# Altium PCB BLDC_driver.PcbDoc
Units mm, origin at the board's own origin, x right, y up, seen from the top; angles counter-clockwise.
Board outline 177.5 x 127.5 mm, 2 copper layers (Top Layer, Bottom Layer); 147 components, 89 nets, 430 pads, 11 vias.
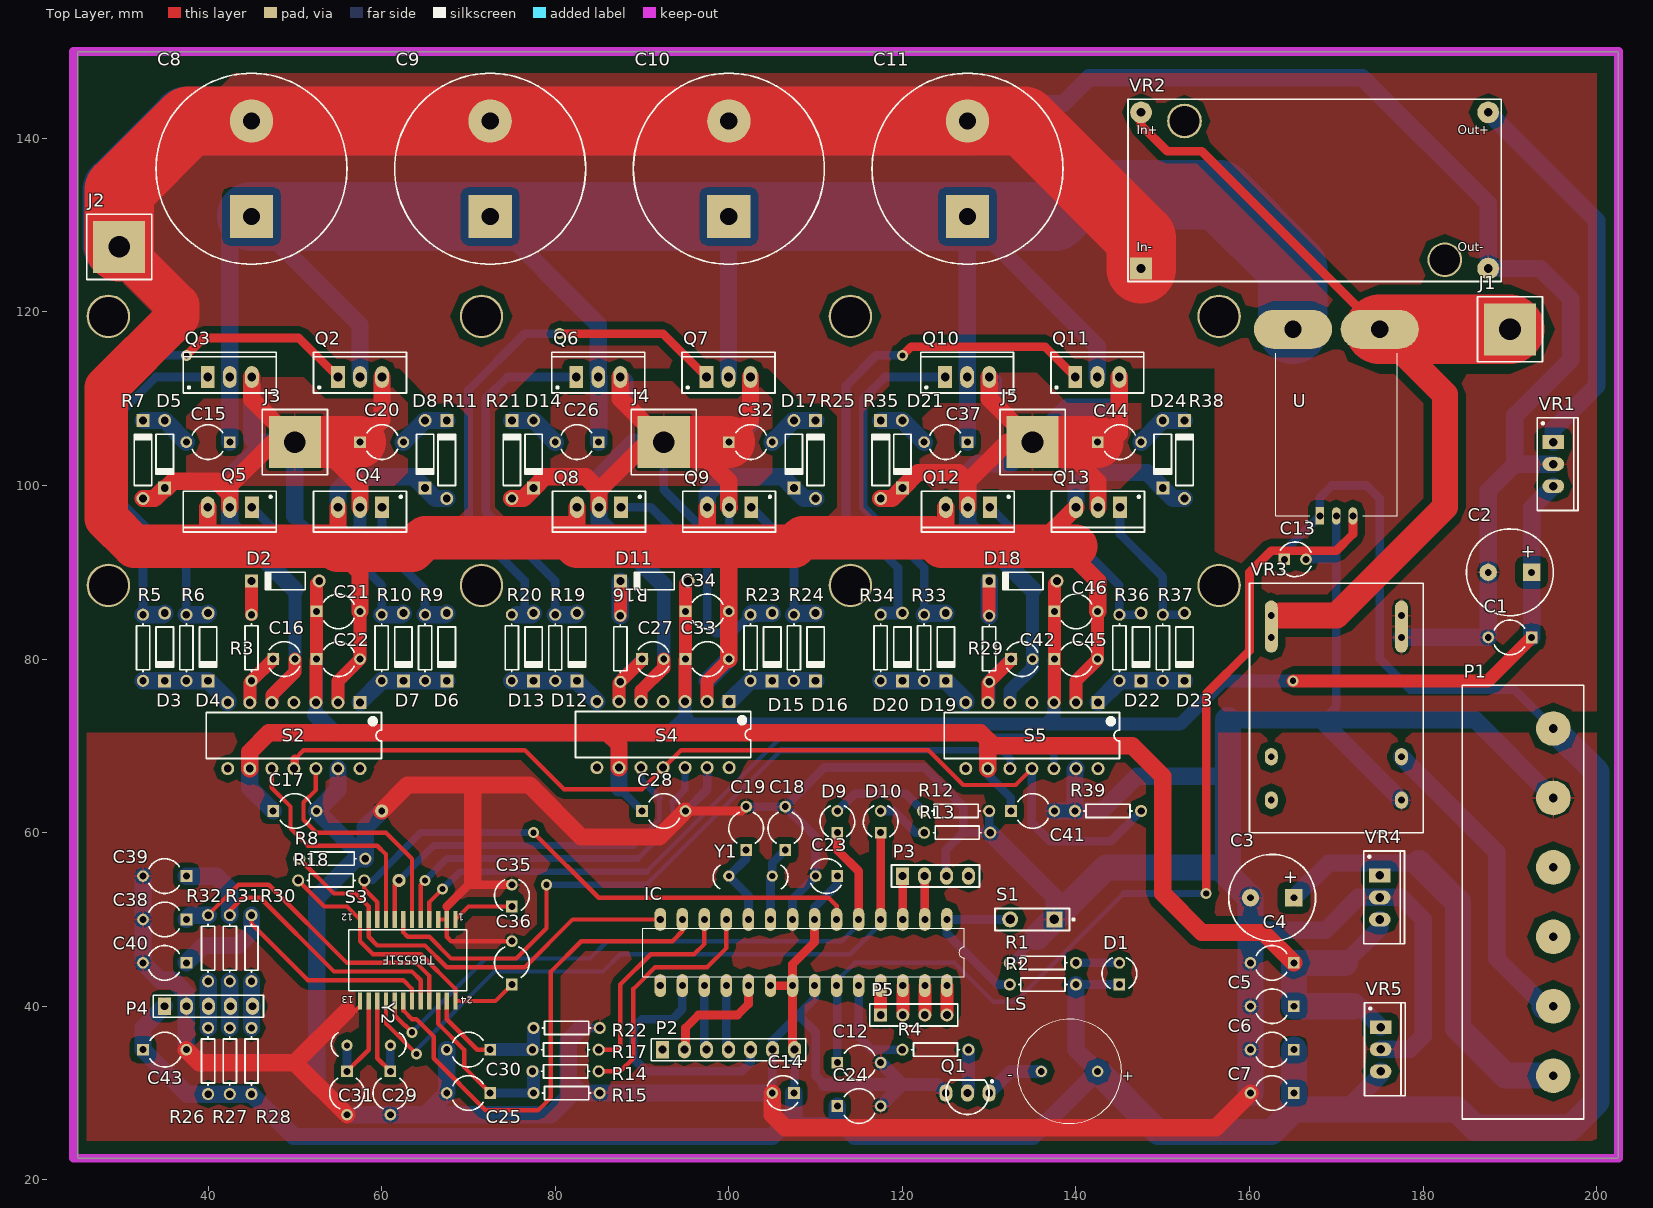
[diagram p0: Top Layer view]
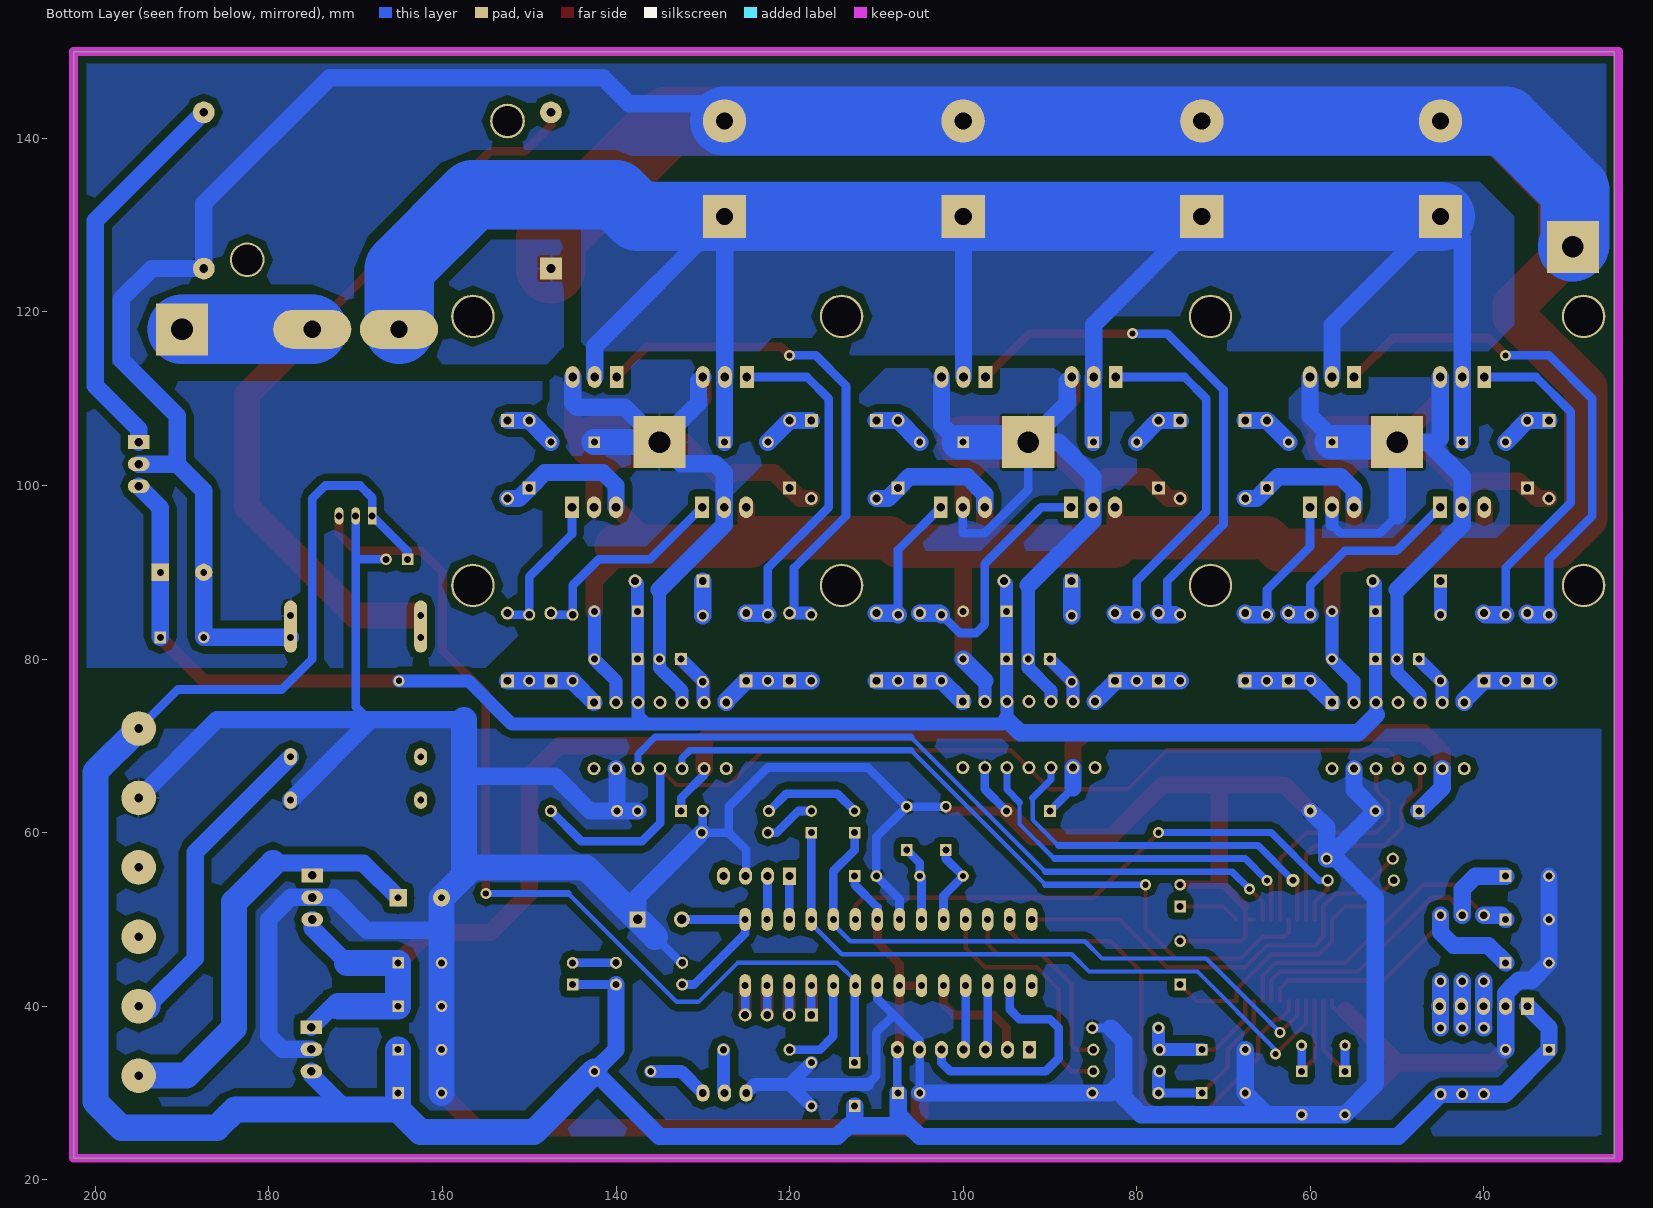
[diagram p1: Bottom Layer view, seen from below]

## Layer stack, top to bottom
Top Solder: solder mask 0.0102, Solder Resist, Dk 3.5
Top Layer: signal copper 0.0356
Dielectric 1: dielectric 0.32, FR-4, Dk 4.8
Bottom Layer: signal copper 0.0356
Bottom Solder: solder mask 0.0102, Solder Resist, Dk 3.5

## Board outline
25,22.5 25,150 202.5,150 202.5,22.5

## Design rules (kind name [scope] priority, off if disabled: settings)
Clearance Polygon [InPolygon] p1: gap=0.8 ignorepadtopadclearanceinfootprint=FALSE
Clearance [All] p2: gap=0.254 ignorepadtopadclearanceinfootprint=FALSE except(0: Arc-Hole Track-Hole SMDPad-Hole THPad-Hole Via-Hole Fill-Hole Poly-Hole Region-Hole Text-Hole)
PolygonConnect [All] p1: connectstyle=Relief reliefconductorwidth=0.254 reliefentries=4 polygonreliefangle="90 Angle" airgapwidth=0.254
RoutingVias [All] p1: holewidth=0.711 width=1.27 viastyle="Through Hole" minholewidth=0.711 minwidth=1.27 maxholewidth=0.711 maxwidth=1.27
SolderMaskExpansion [All] p1: expansion=0.102
Width [All] p1: maxlimit=15 minlimit=0.5 preferedwidth=5
30 further rules are at their usual default settings.

## Components (designator, comment, footprint, x,y, rotation, side; value= is the part's Value field where it differs from the comment)
C1 "Cap-5" CAP-5mm 190,82.5 r180 top value=100nF
C2 "Cap-470" CAP-5-470 190,90 r180 top value=470uF
C3 "Cap-470" CAP-5-470 162.6,52.5 r180 top value=470uF
C4 "Cap-5" CAP-5mm 162.6,45 r180 top value=100nF
C5 "Cap-5" CAP-5mm 162.6,40 r180 top value=100uF
C6 "Cap-5" CAP-5mm 162.6,35 r180 top value=100nF
C7 "Cap-5" CAP-5mm 162.6,30 r180 top value=100uF
C8 "Cap-11" CAP-11mm 45,136.5 r90 top value=2200uF
C9 "Cap-11" CAP-11mm 72.5,136.5 r90 top value=2200uF
C10 "Cap-11" CAP-11mm 100,136.5 r90 top value=2200uF
C11 "Cap-11" CAP-11mm 127.5,136.5 r90 top value=2200uF
C12 "Cap-5" CAP-5mm 115,33.5 r0 top value=100nF
C13 "Cap-2.5" CAP-2.5mm 165.25,91.5 r0 top value=10uF
C14 "Cap-2.5" CAP-2.5mm 106.25,30 r180 top value=10uF
C15 "Cap-5" CAP-5mm 40,105 r180 top value=10nF
C16 "Cap-2.5" CAP-2.5mm 48.75,80 r0 top value=1uF
C17 "Cap-5" CAP-5mm 50,62.5 r0 top value=10nF
C18 "Cap-5" CAP-5mm 106.5,60.5 r90 top value=22pF
C19 "Cap-5" CAP-5mm 102,60.5 r90 top value=22pF
C20 "Cap-5" CAP-5mm 60,105 r0 top value=10nF
C21 "Cap-5" CAP-5mm 55,85.5 r0 top value=10uF
C22 "Cap-5" CAP-5mm 55,80 r0 top value=100nF
C23 "Cap-2.5" CAP-2.5mm 111.25,55 r180 top value=100uF
C24 "Cap-5" CAP-5mm 115,28.5 r0 top value=10nF
C25 "Cap-5" CAP-5mm 70,30 r180 top value=10uF
C26 "Cap-5" CAP-5mm 82.5,105 r180 top value=10nF
C27 "Cap-2.5" CAP-2.5mm 91.25,80 r0 top value=1uF
C28 "Cap-5" CAP-5mm 92.5,62.5 r0 top value=10nF
C29 "Cap-5" CAP-5mm 61,30 r270 top value=20pF
C30 "Cap-5" CAP-5mm 70,35 r180 top value=10uF
C31 "Cap-5" CAP-5mm 56,30 r270 top value=20pF
C32 "Cap-5" CAP-5mm 102.5,105 r0 top value=10nF
C33 "Cap-5" CAP-5mm 97.5,80 r0 top value=10uF
C34 "Cap-5" CAP-5mm 97.5,85.5 r0 top value=100nF
C35 "Cap-2.5" CAP-2.5mm 75,52.75 r90 top value=100uF
C36 "Cap-5" CAP-5mm 75,45 r90 top value=10uF
C37 "Cap-5" CAP-5mm 125,105 r180 top value=10nF
C38 "Cap-5" CAP-5mm 35,50 r180 top value=10nF
C39 "Cap-5" CAP-5mm 35,55 r180 top value=10nF
C40 "Cap-5" CAP-5mm 35,45 r180 top value=10nF
C41 "Cap-5" CAP-5mm 135,62.5 r0 top value=10nF
C42 "Cap-2.5" CAP-2.5mm 133.75,80 r0 top value=1uF
C43 "Cap-5" CAP-5mm 35,35 r0 top value=10uF
C44 "Cap-5" CAP-5mm 145,105 r0 top value=10nF
C45 "Cap-5" CAP-5mm 140,80 r0 top value=10uF
C46 "Cap-5" CAP-5mm 140,85.5 r0 top value=100nF
D1 "LED" LED-2.5mm 145,43.75 r90 top
D2 "Diode 1N5819" DO-5mm 48.9,89 r180 top
D3 "Diode 1N5819" DO-5mm 35,81.4 r270 top
D4 "Diode 1N5819" DO-5mm 40,81.4 r270 top
D5 "Diode 1N5819" DO-5mm 35,103.6 r270 top
D6 "Diode 1N5819" DO-5mm 67.5,81.4 r270 top
D7 "Diode 1N5819" DO-5mm 62.5,81.4 r270 top
D8 "Diode 1N5819" DO-5mm 65,103.6 r270 top
D9 "LED" LED-2.5mm 112.5,61.25 r90 top
D10 "LED" LED-2.5mm 117.5,61.25 r90 top
D11 "Diode 1N5819" DO-5mm 91.4,89 r180 top
D12 "Diode 1N5819" DO-5mm 82.5,81.4 r270 top
D13 "Diode 1N5819" DO-5mm 77.5,81.4 r270 top
D14 "Diode 1N5819" DO-5mm 77.5,103.6 r270 top
D15 "Diode 1N5819" DO-5mm 105,81.4 r270 top
D16 "Diode 1N5819" DO-5mm 110,81.4 r270 top
D17 "Diode 1N5819" DO-5mm 107.5,103.6 r270 top
D18 "Diode 1N5819" DO-5mm 133.9,89 r180 top
D19 "Diode 1N5819" DO-5mm 125,81.4 r270 top
D20 "Diode 1N5819" DO-5mm 120,81.4 r270 top
D21 "Diode 1N5819" DO-5mm 120,103.6 r270 top
D22 "Diode 1N5819" DO-5mm 147.5,81.4 r270 top
D23 "Diode 1N5819" DO-5mm 152.5,81.4 r270 top
D24 "Diode 1N5819" DO-5mm 150,103.6 r270 top
IC "ATMEGA328-PU" DIL28 108.61,46.19 r270 top
J1 "Vcc" Plug-high 190,118 r0 top
J2 "Gnd" Plug-high 29.754,127.5 r0 top
J3 "U" Plug-high 50,105 r0 top
J4 "V" Plug-high 92.5,105 r0 top
J5 "W" Plug-high 135,105 r0 top
LS "Buzzer" CUI_CEM-1201(42) 139.25,32.5 r180 top
P1 "SigConnector" "Sig Connector" 195,72 r270 top
P2 "CAN BUS module" HDR1X7 92.34,35 r0 top
P3 "Debugger" HDR1X4#1 120,55 r0 top
P4 "Hall Sensor" Header-5 34.96,40 r0 top
P5 "Header 4" HDR1X4#2 117.5,39 r0 top
Q1 "2N2222" TO-92A 127.5,30 r90 top
Q2 "NMOS-" TO-220AB 57.5,112.5 r0 top
Q3 "NMOS-" TO-220AB 42.5,112.5 r0 top
Q4 "NMOS-" TO-220AB 57.5,97.5 r180 top
Q5 "NMOS-" TO-220AB 42.5,97.5 r180 top
Q6 "NMOS-" TO-220AB 84.96,112.5 r0 top
Q7 "NMOS-" TO-220AB 99.96,112.5 r0 top
Q8 "NMOS-" TO-220AB 85.04,97.5 r180 top
Q9 "NMOS-" TO-220AB 100.04,97.5 r180 top
Q10 "NMOS-" TO-220AB 127.46,112.5 r0 top
Q11 "NMOS-" TO-220AB 142.46,112.5 r0 top
Q12 "NMOS-" TO-220AB 127.54,97.5 r180 top
Q13 "NMOS-" TO-220AB 142.54,97.5 r180 top
R1 "Res1" AXIAL-5mm 136.19,45 r180 top value=1K
R2 "Res1" AXIAL-5mm 136.19,42.5 r0 top value=10K
R3 "Res1" AXIAL-5mm 45,81.31 r270 top value=10
R4 "Res1" AXIAL-5mm 123.81,35 r0 top value=1k
R5 "Res1" AXIAL-5mm 32.5,81.31 r90 top value=10
R6 "Res1" AXIAL-5mm 37.5,81.31 r90 top value=10
R7 "Res-6mm" DO-6mm 32.5,103 r90 top value=10
R8 "Res1" AXIAL-5mm 54.31,57 r180 top value=10K
R9 "Res1" AXIAL-5mm 65,81.31 r90 top value=10
R10 "Res1" AXIAL-5mm 60,81.31 r90 top value=10
R11 "Res-6mm" DO-6mm 67.5,103 r90 top value=10
R12 "Res1" AXIAL-5mm 126.19,62.5 r0 top value=1K
R13 "Res1" AXIAL-5mm 126.31,60 r0 top value=1K
R14 "Res1" AXIAL-5mm 81.19,32.5 r180 top value=100
R15 "Res1" AXIAL-5mm 81.31,30 r180 top value=10k
R16 "Res1" AXIAL-5mm 87.5,81.19 r270 top value=10
R17 "Res1" AXIAL-5mm 81.19,35 r180 top value=100
R18 "Res1" AXIAL-5mm 54.19,54.5 r180 top value=10K
R19 "Res1" AXIAL-5mm 80,81.31 r90 top value=10
R20 "Res1" AXIAL-5mm 75,81.31 r90 top value=10
R21 "Res-6mm" DO-6mm 75,103 r90 top value=10
R22 "Res1" AXIAL-5mm 81.31,37.5 r180 top value=10K
R23 "Res1" AXIAL-5mm 102.5,81.31 r90 top value=10
R24 "Res1" AXIAL-5mm 107.5,81.31 r90 top value=10
R25 "Res-6mm" DO-6mm 110,103 r90 top value=10
R26 "Res1" AXIAL-5mm 40,33.69 r270 top value=47K
R27 "Res1" AXIAL-5mm 42.5,33.69 r270 top value=47K
R28 "Res1" AXIAL-5mm 45,33.69 r270 top value=47K
R29 "Res1" AXIAL-5mm 130,81.19 r90 top value=10
R30 "Res1" AXIAL-5mm 45,46.69 r90 top value=10
R31 "Res1" AXIAL-5mm 42.5,46.69 r90 top value=10
R32 "Res1" AXIAL-5mm 40,46.69 r90 top value=10
R33 "Res1" AXIAL-5mm 122.5,81.31 r90 top value=10
R34 "Res1" AXIAL-5mm 117.5,81.31 r90 top value=10
R35 "Res-6mm" DO-6mm 117.5,103 r90 top value=10
R36 "Res1" AXIAL-5mm 145,81.31 r90 top value=10
R37 "Res1" AXIAL-5mm 150,81.31 r90 top value=10
R38 "Res-6mm" DO-6mm 152.5,103 r90 top value=10
R39 "Res1" AXIAL-5mm 143.69,62.5 r0 top value=10K
S1 "SW-SPST" SPST-2 134.96,50 r180 top
S2 "IR2112" DIP-14 49.88,71.19 r270 top
S3 "TB6551" DIP12 59.5,46.3 r180 top
S4 "IR2112" DIP-14 92.42,71.31 r270 top
S5 "IR2112" DIP-14 134.92,71.19 r270 top
U "ACS754-150" ACS754-150 170,96.5 r0 top
VR1 "Volt Reg 12" TO-220AB 195,102.46 r270 top
VR2 "Volt Trans" "Volt Trans" 147.5,125 r0 top
VR3 "SCW05C" KLD-0202 170,76.25 r270 top
VR4 "Volt Reg 9" TO-220AB 175,52.54 r270 top
VR5 "Volt Reg 5" TO-220AB 175.1,35.04 r270 top
Y1 "16Mhz" XTAL 102.5,55 r0 top
Y2 "4.9Mhz" XTAL 58.5,35.5 r180 top

## Footprints (in the part's own frame and the unit in brackets; to place one, negate y for a bottom-side part, rotate by r counter-clockwise, add the part's x,y. Pads: shape width x height; smd on the part's side, far side on the other; paste and mask are expansions set on the pad)
ACS754-150 [mm]
  rect 1x2 hole 0.8: 1(-1.91,0)
  oval 1x2 hole 0.8: 2(0,0) 3(1.91,0)
  oval 9x4.5 hole 2: 4(5,21.5) 5(-5,21.5)
  silkscreen extent -7,-0.82 7,18.76
AXIAL-5mm [mm] "Axial Device, Thru-Hole; 2 Leads; 0.3 in Pin Spacing"
  round 1.4 hole 0.85: 1(-3.81,0) 2(3.81,0)
  silkscreen extent -2.77,-0.76 2.77,0.76
CAP-2.5mm [mm] "Capacitor; 2 Leads"
  rect 1.35x1.35 hole 0.8: 1(-1.25,0)
  round 1.35 hole 0.8: 2(1.25,0)
  silkscreen extent -1.69,-2 1.82,2
CAP-5-470 [mm] "Capacitor; 2 Leads"
  rect 2x2 hole 0.8: 1(-2.5,0)
  round 2 hole 0.8: 2(2.5,0)
  silkscreen extent -5,-5 5,5
CAP-5mm [mm] "Capacitor; 2 Leads"
  rect 1.35x1.35 hole 0.8: 1(-2.5,0)
  round 1.35 hole 0.8: 2(2.5,0)
  silkscreen extent -1.69,-2 1.82,2
CAP-11mm [mm] "Capacitor; 2 Leads"
  rect 5x5 hole 2: 1(-5.5,0)
  round 5 hole 2: 2(5.5,0)
  silkscreen extent -11,-11 11,11
CUI_CEM-1201(42) [mm]
  round 1.308 hole 0.8: M(3.25,0) P(-3.25,0)
  silkscreen extent -6,-6 6,6
DIL28 [mil]
  oval 104x52 hole 32: 1(-150,650) 2(-150,550) 3(-150,450) 4(-150,350) 5(-150,250) 6(-150,150) 7(-150,50) 8(-150,-50) 9(-150,-150) 10(-150,-250) 11(-150,-350) 12(-150,-450) 13(-150,-550) 14(-150,-650) 15(150,-650) 16(150,-550) 17(150,-450) 18(150,-350) 19(150,-250) 20(150,-150) 21(150,-50) 22(150,50) 23(150,150) 24(150,250) 25(150,350) 26(150,450) 27(150,550) 28(150,650)
  silkscreen extent -110,-730 110,730
DIP12 [mm] "DIP Switch; 16 Leads"
  rect 0.5x2 smd: 1(-9,-3.7) 2(-8,-3.7) 3(-7,-3.7) 4(-6,-3.7) 5(-5,-3.7) 6(-4,-3.7) 7(-3,-3.7) 8(-2,-3.7) 9(-1,-3.7) 10(0,-3.7) 11(1,-3.7) 12(2,-3.7) 13(2,5.7) 14(1,5.7) 15(0,5.7) 16(-1,5.7) 17(-2,5.7) 18(-3,5.7) 19(-4,5.7) 20(-5,5.7) 21(-6,5.7) 22(-7,5.7) 23(-8,5.7) 24(-9,5.7)
  silkscreen extent -10.29,-2.5 3.3,4.5
DIP-14 [mm] "DIP; 14 Leads; Row Spacing 7.62 mm; Pitch 2.54 mm"
  rect 1.5x1.5 hole 0.9: 1(-3.81,7.62)
  round 1.5 hole 0.9: 2(-3.81,5.08) 3(-3.81,2.54) 4(-3.81,0) 5(-3.81,-2.54) 6(-3.81,-5.08) 7(-3.81,-7.62) 8(3.81,-7.62) 9(3.81,-5.08) 10(3.81,-2.54) 11(3.81,0) 12(3.81,2.54) 13(3.81,5.08) 14(3.81,7.62)
  silkscreen extent -2.65,-10.1 2.65,10.1
DO-5mm [mm] "Diode, Axial; Body 4.6 x 1.9 mm (LxDia. max), Lead Dia. 0.53 mm (max)"
  round 1.5 hole 0.9: 1(-3.9,0)
  rect 1.5x1.5 hole 0.9: 2(3.9,0)
  silkscreen extent -2.3,-1 2.4,1
DO-6mm [mm] "Diode, Axial; Body 4.6 x 1.9 mm (LxDia. max), Lead Dia. 0.53 mm (max)"
  round 1.5 hole 0.9: 1(-4.5,0)
  rect 1.5x1.5 hole 0.9: 2(4.5,0)
  silkscreen extent -3,-1 3,1
HDR1X4#1 [mm] "Connector; Header; 4 Position"
  rect 1.5x2 hole 0.9: 1(0,0)
  oval 1.5x2 hole 0.9: 2(2.54,0) 3(5.08,0) 4(7.62,0)
  silkscreen extent -1.27,-1.27 8.89,1.27
HDR1X4#2 [mm] "Connector; Header; 4 Position"
  rect 1.5x1.5 hole 0.9: 1(0,0)
  round 1.5 hole 0.9: 2(2.54,0) 3(5.08,0) 4(7.62,0)
  silkscreen extent -1.27,-1.27 8.89,1.27
HDR1X7 [mm] "Connector; Header; 7 Position"
  rect 1.5x2 hole 0.9: 1(0,0)
  oval 1.5x2 hole 0.9: 2(2.54,0) 3(5.08,0) 4(7.62,0) 5(10.16,0) 6(12.7,0) 7(15.24,0)
  silkscreen extent -1.27,-1.27 16.51,1.27
Header-5 [mm] "Connector; Header; 5 Position"
  rect 1.5x2 hole 0.9: 1(0,0)
  oval 1.5x2 hole 0.9: 2(2.54,0) 3(5.08,0) 4(7.62,0) 5(10.16,0)
  silkscreen extent -1.27,-1.27 11.43,1.27
KLD-0202 [mm] "DC Power Jack, 2.5mm, KLD Series, PCB Mount"
  oval 2x1.5 hole 0.8: 1(-8.75,-7.5) 1(-6.25,-7.5) 2(-8.75,7.5) 2(-6.25,7.5) 3(7.5,7.5) 4(12.5,7.5) 5(7.5,-7.5) 5(12.5,-7.5)
  oval 6x1.5 all layers, no hole: 1(-7.5,-7.5) 2(-7.5,7.5)
  silkscreen extent -12.5,-10 16.25,10
LED-2.5mm [mm] "Capacitor; 2 Leads"
  rect 1.35x1.35 hole 0.8: 1(-1.25,0)
  round 1.35 hole 0.8: 2(1.25,0)
  silkscreen extent -1.69,-2 1.82,2
Plug-high [mm] "Generic Antenna; 1 Lead"
  rect 6x6 hole 2.5: 1(0,0)
  silkscreen extent -3.75,-3.75 3.75,3.75
"Sig Connector" [mm] "Connector; Header; 6 Position"
  round 4 hole 1: 1(0,0) 2(8,0) 3(16,0) 4(24,0) 5(32,0) 6(40,0)
  silkscreen extent -5,-10.5 45,3.5
SPST-2 [mm] "Switch; 2 Leads"
  rect 1.85x1.85 hole 1.1: 1(-2.54,0)
  round 1.85 hole 1.1: 2(2.54,0)
  silkscreen extent -4.89,-1.27 4.28,1.27
TO-92A [mm] "TO, Flat Index; 3 In-Line, Axial Leads; Body Dia. 4.5mm; Leads 0.51 x 0.48 mm (max)"
  oval 2x1.5 hole 0.9: 1(0,-2.5) 2(0,0) 3(0,2.5)
  silkscreen extent -2.48,-2.96 1.5,2.48
TO-220AB [mm] "TO, Thru-Hole, Vertical, Heatsink Mounted; 3 In-Line Leads; Pitch 2.54 mm"
  rect 1.6x2.5 hole 1: 1(-2.54,0)
  oval 1.6x2.5 hole 1: 2(0,0) 3(2.54,0)
  silkscreen extent -5.35,-1.85 5.35,2.85
"Volt Trans" [mm] "Connector; Header; 2x2 Position"
  rect 2.5x2.5 hole 1: 1(0,0)
  round 4 hole 3.5: 1(5,17) 1(35,1)
  round 2.5 hole 1: 2(0,18) 3(40,0) 4(40,18)
  silkscreen extent -1.5,-1.5 41.5,19.5
XTAL [mm] "Crystal, Thru-Hole; 2 Leads; Body 3.1 x 8.2 mm (Dia.xH)"
  round 1.3 hole 0.7: 1(-2.5,0) 2(2.5,0)
  silkscreen extent -4.31,-1.45 4.31,1.25

## Part data
C1 C2 C3 C4 C5 C6 C7 C8 C9 C10 C11 C12 C13 C14 C15 C16 C17 C18 C19 C20 C21 C22 C23 C24 C25 C26 C27 C28 C29 C30 C31 C32 C33 C34 C35 C36 C37 C38 C39 C40 C41 C42 C43 C44 C45 C46: "Capacitor", PackageDescription="Capacitor; 2 Leads", PackageReference=CAPR5-4X5, Published=23-Sep-2002, Publisher="Altium Limited"
D1 D9 D10: library part LED0, "Typical LED", LatestRevisionDate=08-Jul-2005, LatestRevisionNote="Mech Layer 1 removed.", PackageDescription="LED; 2 Leads", PackageReference=LED-0, Published=8-Jun-2000, Publisher="Altium Limited"
D2 D3 D4 D6 D7 D11 D12 D13 D15 D16 D18 D19 D20 D22 D23: library part "Diode 1N5408", "3 Amp Medium Power Silicon Rectifier Diode", ComponentLink1Description="Manufacturer Link", ComponentLink1URL=http://www.irf.com/, DatasheetVersion=Aug-1984, LatestRevisionDate=17-Jul-2002, LatestRevisionNote="Re-released for DXP Platform.", PackageDescription="Diode, Axial; Body 9.5 x 5.3 mm (LxDia. max), Lead Dia. 1.32 mm (max)", PackageReference=DO-201AD, Published=8-Jun-2000, Publisher="Altium Limited"
D5 D8 D14 D17 D21 D24: library part "Diode 1N4001", "3 Amp Medium Power Silicon Rectifier Diode", ComponentLink1Description="Manufacturer Link", ComponentLink1URL=http://www.irf.com/, DatasheetVersion=Aug-1984, LatestRevisionDate=17-Jul-2002, LatestRevisionNote="Re-released for DXP Platform.", PackageDescription="Diode, Axial; Body 9.5 x 5.3 mm (LxDia. max), Lead Dia. 1.32 mm (max)", PackageReference=DO-201AD, Published=8-Jun-2000, Publisher="Altium Limited"
IC: "AVR AVRAR ATmega Microcontroller IC 8-Bit 20MHz 32KB _16K x 16_ FLASH 28-PDIP", Package="DIP-28 Microchip Technology", Availability=Unavailable, MF="Microchip Technology", MP=ATMEGA328-PU, Price=None, SnapEDA_Link=https://www.snapeda.com/parts/ATMEGA328-PU/Microchip/view-part/4327846/?ref=snap
J1 J2 J3 J4 J5: library part Socket, "Socket", LatestRevisionDate=17-Jul-2002, LatestRevisionNote="Re-released for DXP Platform.", Publisher="Altium Limited"
LS: "Buzzer, 12 mm, 1,5 V, 85 dB", Package="CUI Inc.", Availability=Unavailable, CUI_purchase_URL=https://www.cuidevices.com/product/audio/buzzers/audio-transducers/cem-1201_42_?utm_source=snapeda.com&utm_medium=referral&utm_campaign=snapedaBOM, MF="CUI Devices", MP=CEM-1201_42_, Price=None, SnapEDA_Link=https://www.snapeda.com/parts/CEM-1201%2842%29/CUI%20Devices/view-part/2755977/?ref=snap
P1: "Header, 6-Pin", LatestRevisionDate=17-Jul-2002, LatestRevisionNote="Re-released for DXP Platform.", Publisher="Altium Limited"
P2: "Header, 7-Pin", LatestRevisionDate=17-Jul-2002, LatestRevisionNote="Re-released for DXP Platform.", Publisher="Altium Limited"
P3 P5: "Header, 4-Pin", LatestRevisionDate=17-Jul-2002, LatestRevisionNote="Re-released for DXP Platform.", Publisher="Altium Limited"
P4: "Header, 5-Pin", LatestRevisionDate=17-Jul-2002, LatestRevisionNote="Re-released for DXP Platform.", Publisher="Altium Limited"
Q1: "NPN General Purpose Amplifier", ComponentLink1Description="Manufacturer Link", ComponentLink1URL=http://www.fairchildsemi.com/, ComponentLink2Description=Datasheet, ComponentLink2URL=http://www.fairchildsemi.com/ds/2N%2F2N3904.pdf, DatasheetVersion=1997, LatestRevisionDate=15-Jan-2003, LatestRevisionNote="PCB Footprint 'BCY-W3/D4.7' replaced", PackageDescription="TO, Flat Index; 3 In-Line, Axial Leads; Body Dia. 4.5mm; Leads 0.51 x 0.48 mm (max)", PackageReference=TO-92A, PackageVersion=Sep-1998, Published=8-Jun-2000, Publisher="Altium Limited"
Q2 Q3 Q4 Q5 Q6 Q7 Q8 Q9 Q10 Q11 Q12 Q13: "IRFB4110", ComponentLink1Description="Manufacturer Link", ComponentLink1URL=http://www.irf.com/, DatasheetVersion=PD-9.814, LatestRevisionDate=17-Jul-2002, LatestRevisionNote="Re-released for DXP Platform.", Note="Pin 2 is electrically connected to pin 4.", PackageDescription="TO, Thru-Hole, Vertical, Heatsink Mounted; 3 In-Line Leads; Pitch 2.54 mm", PackageReference=TO-220AB, PackageVersion=Feb-1997, Published=8-Jun-2000, Publisher="Altium Limited"
R1 R2 R3 R4 R5 R6 R7 R8 R9 R10 R11 R12 R13 R14 R15 R16 R17 R18 R19 R20 R21 R22 R23 R24 R25 R26 R27 R28 R29 R30 R31 R32 R33 R34 R35 R36 R37 R38 R39: "Resistor", LatestRevisionDate=17-Jul-2002, LatestRevisionNote="Re-released for DXP Platform.", PackageDescription="Axial Device, Thru-Hole; 2 Leads; 0.3 in Pin Spacing", PackageReference=AXIAL-0.3, Published=8-Jun-2000, Publisher="Altium Limited"
S1: "Single-Pole, Single-Throw Switch", LatestRevisionDate=17-Jul-2002, LatestRevisionNote="Re-released for DXP Platform.", PackageDescription="Switch; 2 Leads", PackageReference=SPST-2, Published=24-Mar-1999, Publisher="Altium Limited"
S2 S4 S5: library part "SW DIP-7", "DIP Switch, 7 Position, SPST", Code_JEDEC=MO-001-AF, LatestRevisionDate=17-Jul-2002, LatestRevisionNote="Re-released for DXP Platform.", PackageReference=DIP-14, Published=24-Mar-1999, Publisher="Altium Limited"
S3: "DIP Switch, 8 Position, SPST", LatestRevisionDate=17-Jul-2002, LatestRevisionNote="Re-released for DXP Platform.", PackageDescription="DIP Switch; 16 Leads", PackageReference=DIP_SW_8WAY_SMD, Published=24-Mar-1999, Publisher="Altium Limited"
U: "Current Sensor 50A 1 Channel Hall Effect, Open Loop Unidirectional 5-CB Formed Leads, PFF", Package="5-CB-5 Allegro MicroSystems LLC", Availability=Unavailable, MF="Allegro MicroSystems LLC", MP=ACS758, Price=None, SnapEDA_Link=https://www.snapeda.com/parts/ACS758/Allegro%20MicroSystems%20LLC/view-part/226237/?ref=snap
VR1 VR2 VR3 VR4 VR5: "Voltage Regulator", LatestRevisionDate=29-May-2009, LatestRevisionNote="IPC-7351 Footprint Added.", PackageDescription="3-Pin Transistor Outline Package 2.54 mm Pitch, 15.1 mm Lead Span", PackageReference=D2PAK, Published=24-Mar-1999, Publisher="Altium Limited"
Y1 Y2: library part XTAL, "Crystal Oscillator", LatestRevisionDate=17-Jul-2002, LatestRevisionNote="Re-released for DXP Platform.", PackageDescription="Crystal, Thru-Hole; 2 Leads; Body 3.1 x 8.2 mm (Dia.xH)", PackageReference=R38, Published=8-Jun-2000, Publisher="Altium Limited"

## Free pads (board coordinates)
  round 1.524 hole 0.762: 2(60,62.5) 4(62,54.5)
  round 5 hole 4.5: 5(28.5,88.5) 5(71.5,88.5) 5(71.5,119.5) 5(114,88.5) 5(156.5,88.5) 6(28.5,119.5) 6(114,119.5) 6(156.5,119.5)

## Via types
v1: diameter 1.27, hole 0.711, Top Layer to Bottom Layer, 11 vias

## Nets (pads, with @x,y where several pads share a name; then routed paths per layer and width w, separated by ;. In a path a pad name is that pad's centre, name@x,y a point inside that pad or via, vN(x,y) a via of type N, cw(c..) or ccw(c..) an arc to the next point about the centre after c; other vN are vias at no path point)
NetC3_1: C3.1 P1.6 VR4.1 | length 50.2
  Bottom Layer w2: C3.1 169.1,56.5 179.5,56.5
  Bottom Layer w3: 179.5,56.5 184,52 184,37.5 189.5,32 P1.6
NetC8_1: C8.1 C9.1 C10.1 C11.1 C15.1 C26.1 C37.1 Q2.2 Q3.2 Q6.2 Q7.2 Q10.2 Q11.2 U.5 | length 282.7
  Bottom Layer w2: C15.1 Q3.2 42.5,128.5 C8.1 57.5,118.5 Q2.2 ; C9.1 84.96,118.54 Q6.2 85,112.46 C26.1 ; Q7.2 99.96,130.96 C10.1 ; C37.1 127.5,112.46 Q10.2 127.46,130.96 C11.1 142.46,116.04 Q11.2
  Bottom Layer w8: C8.1 C9.1 C10.1 C11.1 137.5,131 140,133.5 156.5,133.5 165,125 U.5
NetC12_1: C12.1 IC.23 U.3 | length 114.8
  Top Layer w1: v1(155,53) 155,76 160,81 160,90 162.5,92.5 170,92.5 171.91,94.41 U.3
  Bottom Layer w0.5: IC.23@112.42,42.92 114.5,45 126,45 130.5,40.5 133,40.5 145.5,53
  Bottom Layer w0.8: 145.5,53 v1(155,53)
  Bottom Layer w1: IC.23@112.42,42.92 IC.23 112.5,42.3 C12.1
NetC15_2: C15.2 D5.1 R7.2 | length 6
  Bottom Layer w2: R7.2 D5.1 C15.2
NetC16_1: C16.1 R3.2 S2.6 | length 12.2
  Top Layer w1.5: S2.6 44.8,77.3 R3.2 C16.1
  Bottom Layer w1.5: S2.6 44.8,77.3 R3.2 C16.1
NetC16_2: C16.2 C20.1 D5.2 J3.1 Q2.3 Q3.3 Q4.2 Q5.2 R7.1 S2.5 | length 148.2
  Top Layer w1.5: S2.5 47.34,75.84 50,78.5 C16.2
  Top Layer w2: R7.1 33.8,98.5 D5.2 35.2,99.7 36,100.5 41,100.5 42.5,99 ; Q5.2 42.5,99 ; Q3.3 45.04,109.96 J3.1 ; Q4.2 57.5,100 52.5,105 J3.1 ; C20.1 60.04,107.54 Q2.3 ; 42.5,99 42.5,100 47.5,105 J3.1
  Top Layer w6: J3.1@52.5,105 C20.1
  Bottom Layer w1: 50,96.5 52,94.5 56.5,94.5 57.5,95.5
  Bottom Layer w1.5: S2.5 47.34,75.84 50,78.5 C16.2 50,88 ; 57.5,95.5 Q4.2
  Bottom Layer w2: Q3.3 45.04,105.46 45.5,105 46.5,105 ; 50,88 42.5,95.5 Q5.2 42.5,101 46.5,105 ; 50,96.5 J3.1 46.5,105 ; C20.1 57.5,105.5 60.04,108.04 Q2.3
  Bottom Layer w4: J3.1 C20.1
NetC18_1: C18.1 IC.9 Y1.2 | length 8.7
  Bottom Layer w1: IC.9 104.8,54.8 Y1.2 105,56.5 C18.1
NetC19_1: C19.1 IC.10 Y1.1 | length 9.8
  Bottom Layer w1: C19.1 102,57 Y1.1 102.26,52.74 IC.10
NetC20_2: C20.2 D8.1 R11.2 | length 6
  Bottom Layer w2: C20.2 D8.1 R11.2
NetC25_1: C25.1 R14.2 R15.2 S3.22 | length 20.6
  Top Layer w0.5: S3.22 66.5,38 69.5,35 69.5,33 C25.1
  Bottom Layer w1: C25.1 R15.2
  Bottom Layer w1.5: R14.2 77.5,32.38 R15.2
NetC26_2: C26.2 D14.1 R21.2 | length 6
  Bottom Layer w2: R21.2 D14.1 C26.2
NetC27_1: C27.1 R16.2 S4.6 | length 11.8
  Top Layer w1.5: S4.6 87.34,77.22 R16.2 90,79.88 C27.1
  Bottom Layer w1.5: S4.6 87.34,77.22 R16.2 ; R16.2@87.5,77.5 C27.1
NetC27_2: C27.2 C32.1 D14.2 J4.1 Q6.3 Q7.3 Q8.2 Q9.2 R21.1 S4.5 | length 147.6
  Top Layer w1.5: S4.5 89.88,76.38 92.5,79 C27.2
  Top Layer w2: R21.1 76.3,98.5 D14.2 78.8,101 83.5,101 85.04,99.46 ; Q8.2 85.04,99.46 ; Q6.3 87.5,110 J4.1 ; C32.1 102.5,107.5 Q7.3 ; Q9.2 100,97.54 100,100.5 95.5,105 J4.1 ; 85.04,99.46 90.58,105 J4.1
  Top Layer w6: 95.5,105 C32.1
  Bottom Layer w1: J4.1 92.5,99.5 97.5,94.5 100,94.5 100.04,94.54 Q9.2
  Bottom Layer w1.5: S4.5 89.88,76.38 92.5,79 C27.2 92.5,88.5
  Bottom Layer w2: Q6.3 88,112 88,109.5 J4.1 89,105 85.04,101.04 Q8.2 85.04,95.96 92.5,88.5 ; C32.1@100.5,105 102.5,107 Q7.3
  Bottom Layer w4: J4.1 C32.1 C32.1@100.5,105
NetC29_1: C29.1 S3.15 Y2.1 | length 11.7
  Top Layer w0.5: S3.15 59.5,34 C29.1
  Bottom Layer w1: C29.1 Y2.1
NetC30_1: C30.1 R17.2 R22.2 S3.23 | length 16
  Top Layer w0.5: S3.23 67.5,38.5 71,35 C30.1
  Bottom Layer w1.5: C30.1 R17.2 77.5,35.12 R22.2
NetC31_1: C31.1 S3.14 Y2.2 | length 12.1
  Top Layer w0.5: C31.1 58.5,35 S3.14
  Bottom Layer w1: C31.1 Y2.2
NetC32_2: C32.2 D17.1 R25.2 | length 6
  Bottom Layer w2: C32.2 D17.1 R25.2
NetC35_1: C35.1 S3.1 | length 7.1
  Top Layer w0.5: S3.1 70,51.5 C35.1
NetC36_1: C36.1 R18.2 S3.12 S3.24 | length 33.4
  Top Layer w0.5: R18.2 53.38,51.5 56,51.5 S3.12 57.5,47.5 59,46 64.5,46 68.5,42 S3.24 73.1,40.6 C36.1
NetC37_2: C37.2 D21.1 R35.2 | length 6
  Bottom Layer w2: R35.2 D21.1 C37.2
NetC38_1: C38.1 R32.2 S3.21 | length 36.9
  Top Layer w0.5: R32.2 43.5,54 47,54 56,45 64,45 65.5,43.5 S3.21
  Bottom Layer w2: C38.1 38,50.5 R32.2
NetC39_1: C39.1 R31.2 S3.20 | length 38.1
  Top Layer w0.5: R31.2 42.5,51 44,52.5 46,52.5 54.5,44 63.5,44 64.5,43 S3.20
  Bottom Layer w2: C39.1 41,55 42.5,53.5 R31.2
NetC40_1: C40.1 R30.2 S3.19 | length 35
  Top Layer w0.5: R30.2 45,49.5 51.5,43 62.5,43 63.5,42 S3.19
  Bottom Layer w2: C40.1 39.5,47 43.5,47 45,48.5 R30.2
NetC42_1: C42.1 R29.1 S5.6 | length 12.2
  Top Layer w1.5: S5.6 129.84,77.22 R29.1 132.5,79.88 C42.1
  Bottom Layer w1.5: S5.6 130,75.16 130,77.5 C42.1
NetC42_2: C42.2 C44.1 D21.2 J5.1 Q10.3 Q11.3 Q12.2 Q13.2 R35.1 S5.5 | length 131.4
  Top Layer w2: R35.1 118.8,98.5 D21.2 121.8,101.5 126.5,101.5 127.54,100.46 ; Q12.2 127.54,100.46 ; Q10.3 130,110 J5.1 ; C44.1 144,105 145,106 Q11.3 ; Q13.2 142.54,100.46 138,105 J5.1 ; 127.54,100.46 132.08,105 J5.1
  Top Layer w6: 138,105 C44.1
  Bottom Layer w1.5: S5.5 132.38,76.38 135,79 C42.2 135,88
  Bottom Layer w2: Q10.3 130.5,112 130.5,109.5 J5.1 ; 135,88 127.54,95.46 Q12.2 127.54,101.46 128.58,102.5 132.5,102.5 J5.1 ; Q11.3 145,109.5 144.5,109 139,109 J5.1
  Bottom Layer w3: J5.1 C44.1
NetC44_2: C44.2 D24.1 R38.2 | length 6
  Bottom Layer w2: C44.2 D24.1 R38.2
NetD1_2: D1.2 R1.1 | length 5
  Bottom Layer w1: R1.1 D1.2
NetD2_2: D2.2 R3.1 | length 7.8
  Top Layer w1.5: R3.1 D2.2
  Bottom Layer w1.5: R3.1 D2.2
NetD3_1: D3.1 Q2.1 R5.2 | length 61.7
  Top Layer w1: v1(37.5,115) 39.5,117 50.46,117 Q2.1
  Bottom Layer w1: R5.2 32.5,91.5 27.5,96.5 27.5,110 32.5,115 v1(37.5,115)
  Bottom Layer w2: R5.2 34.82,85.12 D3.1
NetD3_2: D3.2 D4.2 R5.1 R6.1 S2.7 | length 10.9
  Bottom Layer w2: R5.1 D3.2 R6.1 D4.2 42.26,75.24 S2.7
NetD4_1: D4.1 Q3.1 R6.2 | length 40.7
  Bottom Layer w1: R6.2 37.5,90.5 30,98 30,108.5 34,112.5 Q3.1
  Bottom Layer w2: R6.2 39.82,85.12 D4.1
NetD6_1: D6.1 Q4.1 R9.2 | length 17
  Bottom Layer w1: Q4.1 60.04,92.96 65,88 R9.2
  Bottom Layer w2: R9.2 67.32,85.12 D6.1
NetD6_2: D6.2 D7.2 R9.1 R10.1 S2.1 | length 11
  Bottom Layer w2: S2.1 R10.1 D7.2 R9.1 D6.2
NetD7_1: D7.1 Q5.1 R10.2 | length 24.6
  Bottom Layer w1: Q5.1 50.04,92.5 56,92.5 60,88.5 R10.2
  Bottom Layer w2: R10.2 62.32,85.12 D7.1
NetD9_1: D9.1 IC.5 S3.17 | length 83.7
  Top Layer w0.5: S3.17 61.5,38.934 62.688,37.746 62.754,37.746 v1(63.5,37)
  Top Layer w1: D9.1 112.5,58 114.96,55.54 IC.5
  Bottom Layer w0.5: v1(63.5,37) 72,45.5 84,45.5 86,47.5 113,47.5 114.96,49.46 IC.5
  Bottom Layer w1: D9.1 112.5,58 114.96,55.54 IC.5
NetD9_2: D9.2 R12.1 | length 11.5
  Bottom Layer w1: D9.2 114.5,64.5 120.38,64.5 R12.1
NetD10_1: D10.1 IC.4 S3.16 | length 88.1
  Top Layer w0.5: S3.16 60.5,38 v1(64,34.5)
  Top Layer w1: IC.4 D10.1
  Bottom Layer w0.5: v1(64,34.5) 64,35 73,44 85.5,44 87.5,46 114,46 117.5,49.5 IC.4
  Bottom Layer w1: IC.4 D10.1
NetD10_2: D10.2 R13.1 | length 6
  Bottom Layer w1: D10.2 119,62.5 121.5,60 R13.1
NetD11_2: D11.2 R16.1 | length 8
  Top Layer w1.5: R16.1 D11.2
  Bottom Layer w2: R16.1 D11.2
NetD12_1: D12.1 Q6.1 R19.2 | length 42.2
  Bottom Layer w1: R19.2 80,89 72,97 72,110 74.5,112.5 Q6.1
  Bottom Layer w2: R19.2 82.32,85.12 D12.1
NetD12_2: D12.2 D13.2 R19.1 R20.1 S4.7 | length 10.8
  Bottom Layer w2: R20.1 D13.2 R19.1 D12.2 82.5,77.42 S4.7
NetD13_1: D13.1 Q7.1 R20.2 | length 63.7
  Top Layer w1: v1(80.5,117.5) 92.42,117.5 Q7.1
  Bottom Layer w1: R20.2 75.62,85.12 76.5,86 76.5,89 70,95.5 70,111 76.5,117.5 v1(80.5,117.5)
  Bottom Layer w2: R20.2@75.62,85.12 77.32,85.12 D13.1
NetD15_1: D15.1 Q8.1 R23.2 | length 28.5
  Bottom Layer w1: Q8.1 91,97.5 97.5,91 97.5,84 98.5,83 100.38,83 R23.2
  Bottom Layer w2: R23.2 102.68,85.3 D15.1
NetD15_2: D15.2 D16.2 R23.1 R24.1 S4.1 | length 10.9
  Bottom Layer w2: S4.1 100.12,75.12 R23.1 D15.2 R24.1 D16.2
NetD16_1: D16.1 Q9.1 R24.2 | length 17
  Bottom Layer w1: Q9.1 107.5,92.58 R24.2
  Bottom Layer w2: R24.2 107.68,85.3 D16.1
NetD18_2: D18.2 R29.2 | length 8
  Top Layer w1.5: R29.2 D18.2
  Bottom Layer w2: R29.2 D18.2
NetD19_1: D19.1 Q10.1 R33.2 | length 40.8
  Bottom Layer w1: R33.2 122.5,90.5 115.5,97.5 115.5,110 118,112.5 Q10.1
  Bottom Layer w2: R33.2 122.68,85.3 D19.1
NetD19_2: D19.2 D20.2 R33.1 R34.1 S5.7 | length 11
  Bottom Layer w2: R34.1 D20.2 R33.1 D19.2 127.3,75.2 S5.7
NetD20_1: D20.1 Q11.1 R34.2 | length 60.4
  Top Layer w1: v1(120,115) 121,116 136.42,116 Q11.1
  Bottom Layer w1: R34.2 R34.2@117.68,85.3 ; D20.1@119.3,85.3 119.5,85.5 119.5,90.5 113.5,96.5 113.5,111.5 117,115 v1(120,115)
  Bottom Layer w1.5: R34.2@117.68,85.3 D20.1@119.3,85.3
NetD22_1: D22.1 Q12.1 R36.2 | length 24.6
  Bottom Layer w1: Q12.1 136.08,91.5 142,91.5 145,88.5 R36.2 147.32,85.12 D22.1
NetD22_2: D22.2 D23.2 R36.1 R37.1 S5.1 | length 11
  Bottom Layer w1: R36.1@145,77.46 R36.1
  Bottom Layer w2: S5.1 R36.1@145,77.46 ; R36.1 D22.2 R37.1 D23.2
NetD23_1: D23.1 Q13.1 R37.2 | length 17
  Bottom Layer w1: Q13.1 145.08,94.42 150,89.5 R37.2 152.32,85.12 D23.1
NetIC_1: IC.1 R2.1 S1.2 | length 18.6
  Bottom Layer w1: R2.1 131,42.5 125.12,48.38 IC.1 S1.2
NetIC_2: IC.2 P3.2 | length 10
  Top Layer w1: P3.2 122.58,54.96 IC.2
  Bottom Layer w1: P3.2 122.54,50.04 IC.2
NetIC_3: IC.3 P3.1 | length 10
  Top Layer w1: P3.1 120.04,54.96 IC.3
  Bottom Layer w1: P3.1 120.04,54.96 IC.3
NetIC_6: IC.6 R18.1 S3.10 | length 66.9
  Top Layer w0.5: R18.1 58,53.5 59.5,52 S3.10 ; v1(77.5,60) 85,52.5 111.5,52.5 112.42,51.58 IC.6
  Bottom Layer w0.8: R18.1 59,54.5 64.5,60 v1(77.5,60)
NetIC_11: IC.11 R14.1 | length 28.6
  Top Layer w0.5: R14.1 87.5,32.5 89,34 89,42 91.5,44.5 97.5,44.5 99.72,46.72 IC.11
NetIC_12: IC.12 R17.1 | length 24.1
  Top Layer w0.5: R17.1 87,35 87.5,35.5 87.5,42.5 91,46 96,46 97.18,47.18 IC.12
NetIC_13: IC.13 S3.18 | length 57.9
  Top Layer w0.5: S3.18 62.5,39.5 63.5,38.5 64,38.5 66,36.5 66,34 72,28 78,28 79.5,29.5 79.5,44 83,47.5 93.5,47.5 94.64,48.64 IC.13
NetIC_14: IC.14 R8.2 S3.11 | length 51.1
  Top Layer w0.5: R8.2 54.5,53 57,53 58.5,51.5 S3.11 58.5,48 59.5,47 65,47 67.5,44.5 76.5,44.5 82,50 IC.14
NetIC_16: IC.16 P2.5 | length 28.8
  Bottom Layer w1: IC.16 94.64,39.64 93.5,38.5 90,38.5 89,37.5 89,34 90.5,32.5 101.5,32.5 102.5,33.5 P2.5
NetIC_17: IC.17 P2.3 | length 7.5
  Bottom Layer w1: IC.17 97.18,35.24 P2.3
NetIC_18: IC.18 P2.4 | length 7.5
  Bottom Layer w1: IC.18 99.72,35.24 P2.4
NetIC_19: IC.19 P2.2 | length 13.1
  Top Layer w1: P2.2 95,35.12 95,37.5 96.5,39 101,39 102.26,40.26 IC.19
NetIC_24: IC.24 R4.1 | length 11.6
  Bottom Layer w1: IC.24@115,42.34 IC.24 114.96,36.54 116.496,35.004 119.996,35.004 R4.1
NetIC_25: IC.25 P5.1 | length 6.8
  Top Layer w1.5: P5.1 IC.25
  Bottom Layer w1: P5.1 IC.25
NetIC_26: IC.26 P5.2 | length 6.8
  Top Layer w1.5: P5.2 IC.26
  Bottom Layer w1: P5.2 IC.26
NetIC_27: IC.27 P5.3 | length 6.8
  Top Layer w1.5: P5.3 IC.27
  Bottom Layer w1: P5.3 IC.27
NetIC_28: IC.28 P5.4 | length 6.8
  Top Layer w1.5: P5.4 IC.28
  Bottom Layer w1: P5.4 IC.28
NetLS_M: LS.M Q1.1 | length 7
  Bottom Layer w1.5: Q1.1 132.5,32.5 LS.M
NetP1_5: P1.5 VR3.3 | length 36.6
  Bottom Layer w2: VR3.3 188.5,57.75 188.5,45.5 P1.5@194,40
  Bottom Layer w3: P1.5@194,40 P1.5
NetP4_3: P4.3 R26.1 R32.1 | length 5.4
  Bottom Layer w2: R26.1 40.04,37.54 P4.3 40,40.04 R32.1
NetP4_4: P4.4 R27.1 R31.1 | length 5.4
  Bottom Layer w2: R27.1 42.5,39.92 P4.4 42.5,40.08 R31.1
NetP4_5: P4.5 R28.1 R30.1 | length 5.5
  Bottom Layer w2: R28.1 45,39.88 P4.5 45,40.12 R30.1
NetQ1_2: Q1.2 R4.2 | length 5
  Bottom Layer w1.5: Q1.2 127.62,30.12 R4.2
NetR39_2: R39.2 S2.11 S4.11 S5.11 | length 113.9
  Top Layer w0.5: 50,68.5 51,69.5 76.5,69.5 81,65 90,65 S4.11@92.46,67.46 ; S4.11 92.92,68 93,68 94.5,69.5 123,69.5 127,65.5 133.04,65.5 S5.11
  Top Layer w1: S2.11 50,67.5 50,68.5
  Bottom Layer w1: S5.11 134.92,61.08 137,59 144,59 R39.2
NetS2_10: S2.10 S3.9 | length 27.5
  Top Layer w0.5: S2.10 47.34,65.16 49.5,63 49.5,60.5 51.5,58.5 59.5,58.5 60.5,57.5 S3.9
NetS2_12: S2.12 S3.6 | length 27.8
  Top Layer w0.5: S2.12 52.42,64.92 51,63.5 51,61.5 52.5,60 60.5,60 63.5,57 S3.6
NetS3_4: S3.4 S5.12 | length 84.3
  Top Layer w0.5: S3.4 65.5,52 v1(67,53.5)
  Bottom Layer w0.5: 90.5,55.5 106,71
  Bottom Layer w0.8: v1(67,53.5) 69,55.5 90.5,55.5 ; 106,71 135.5,71 137.46,69.04 S5.12
NetS3_5: S3.5 S4.12 | length 43
  Top Layer w0.5: S3.5 64.5,54 v1(65,54.5)
  Bottom Layer w0.5: 89.5,57 93.5,61 93.5,63.5
  Bottom Layer w0.8: v1(65,54.5) 67.5,57 89.5,57 ; 93.5,63.5 94.96,64.96 S4.12
NetS3_7: S3.7 S5.10 | length 87.1
  Top Layer w0.5: S3.7 62.5,48.5 63,48 65.5,48 68,45.5 75.5,45.5 79,49 v1(79,54)
  Bottom Layer w0.5: 90.5,54 106,69.5
  Bottom Layer w0.8: v1(79,54) 90.5,54 ; 106,69.5 131.5,69.5 132.38,68.62 S5.10
NetS3_8: pad.4 S3.8 S4.10 | length 44.5
  Top Layer w0.5: S3.8 61.5,54 pad.4
  Bottom Layer w0.5: 89,58.5 92,61.5 92,64
  Bottom Layer w0.8: pad.4 66,58.5 89,58.5 ; S4.10 89.88,66.12 92,64
NetVR1_1: VR1.1 VR2.4 | length 45.2
  Bottom Layer w2: VR2.4 200,130.5 200,111.5 195,106.5 VR1.1
PGND: C1.2 C2.2 C8.2 C9.2 C10.2 C11.2 C21.2 C22.2 C33.2 C34.2 C45.2 C46.2 D8.2 D17.2 D24.2 J2.1 Q4.3 Q5.3 Q8.3 Q9.3 Q12.3 Q13.3 R11.1 R25.1 R38.1 S2.2 S4.2 S5.2 VR1.2 VR2.1@147.5,125 VR2.3 VR3.2 | length 707.7
  Top Layer w1: 99.5,93 100,92.5
  Top Layer w1.5: S2.2 54.96,77.46 C22.2 C21.2 ; S4.2 97.5,77.5 C33.2 ; S5.2 140,77.5 C45.2 C46.2
  Top Layer w2: 39.96,93.96 Q5.3 ; Q4.3 54.96,93 54.96,92.54 57.5,90 C21.2 ; 82.5,93 Q8.3 ; Q9.3 97.5,95 99.5,93 ; C33.2 C34.2 100,92.5 ; Q12.3 125,95 127,93 ; 135.5,93 Q13.3 ; 140,93 140,91.5 142.5,89 C46.2
  Top Layer w5: J2.1 36.5,120.754 36.5,119.5 28.254,111.254 28.254,96.246 31.5,93 54.96,93 ; 54.96,92.54 63.54,92.54 65,94 81.5,94 82.5,93 99.5,93 107.5,93 108.5,94 123.5,94 124.5,93 127,93 135.5,93 140,93
  Top Layer w8: J2.1 29.754,134 37.754,142 C8.2 C9.2 C10.2 C11.2 134,142 147.5,128.5 VR2.1@147.5,125
  Bottom Layer w1.5: S2.2 54.96,77.46 C22.2 C21.2 ; S4.2 97.5,77.5 ; S5.2 140,77.5 C45.2 C46.2
  Bottom Layer w2: Q4.3 54.96,99.46 56.5,101 63.7,101 D8.2 66.2,98.5 R11.1 ; 97.5,77.5 C33.2 ; Q9.3 97.5,99 99.5,101 106.2,101 D17.2 108.7,98.5 R25.1 ; C11.2 129.5,144 138.5,144 141.5,147 173,147 187.5,132.5 VR2.3 193.5,125 197,121.5 197,114.5 190.54,108.04 190.54,102.46 ; Q13.3 140,100 141.5,101.5 148.2,101.5 D24.2 151.2,98.5 R38.1 ; VR3.2@177.5,82.5 C1.2 C2.2 187.5,99.42 190.54,102.46 ; VR1.2 190.54,102.46
  Bottom Layer w8: J2.1 29.5,127.754 29.5,134 37.5,142 C8.2 C9.2 C10.2 C11.2
S-GND: C3.2 C4.2 C5.2 C6.2 C7.2 C12.2 C13.2 C14.2 C17.2 C18.2 C19.2 C23.2 C24.2 C25.2 C28.2 C29.2 C30.2 C31.2 C35.2 C36.2 C38.2 C39.2 C40.2 C41.2 C43.2 IC.8 IC.22 P1.2 P2.6 P3.3 P4.2 pad.2 Q1.3 R1.2 R8.1 R12.2 R13.2 R15.1 R22.1 R39.1 S1.1 S2.13 S3.2 S3.3 S3.13 S4.13 S5.13 U.2 VR3.4 VR4.2 VR5.2 | length 665.1
  Top Layer w0.5: 56,39.5 57,39.5 57.5,40 S3.13 ; S3.3 S3.2 ; 67.5,51.5 S3.2 ; C36.2 68,47.5 67.5,48 S3.2
  Top Layer w1: 67.5,51.5 70,54 C35.2 ; C28.2 101.5,62.5 C19.2
  Top Layer w2: C43.2 39,33.5 50,33.5 ; C31.2 50,33.5 ; 56,39.5 50,33.5 ; pad.2 63,65.5 70.5,65.5 ; 70.5,54.5 70.5,65.5 ; C28.2 92,59.5 83,59.5 77,65.5 70.5,65.5 ; C14.2 105,27.5 106.5,26 156.1,26 C7.2
  Bottom Layer w1: 83,37.5 R22.1 ; C28.2 97.5,65 S4.13 ; C19.2 C18.2 ; C14.2 105,34.96 P2.6 105.04,36.04 108,39 ; IC.8 107.34,52.34 C23.2 110,59.5 C18.2 ; IC.22 109.88,40.88 108,39 ; 111,31 110,32 110,37 108,39 ; P3.3 125,55.08 125,58 127,60 ; R12.2 130,60.12 R13.2 127,60 ; R1.2 132.5,45 135.5,48 ; C13.2 170,91.5 ; 168.5,72.75 168.5,73 170,74.5 170,91.5 ; U.2 170,92.5 170,91.5 ; C18.2 111,67.5 122.5,67.5 127,63 127,60
  Bottom Layer w1.5: 111,31 115,31 120,31 ; C24.2 120,31 ; C12.2 120,31 ; Q1.3 124,31 120,31
  Bottom Layer w2: C39.2 C38.2 C40.2 34.5,43 36,43 37.5,41.5 P4.2 C43.2 ; S2.13 54.96,64.96 C17.2 R8.1@58,57 ; pad.2 58.12,60.62 R8.1 R8.1@58,57 ; C30.2 C25.2 65,27.5 ; 83,37.5 81.5,36 81.5,31.5 ; C14.2 R15.1 83,30 81.5,31.5 ; R13.2 137.5,52.62 S1.1 ; C41.2 R39.1 ; S5.13 139.88,67.26 R39.1 ; 157.5,66.5 147,66.5 143,62.5 R39.1 ; 157.5,73 168.5,73 ; 160.1,48.75 168.75,48.75 172.54,52.54 VR4.2 177.46,52.54 180,50 180,36.58 178.46,35.04 VR5.2 ; VR3.4 168.5,72.75 168.5,73 ; P1.2 186,73 168.5,73 ; R8.1@58,57 57,57 52.5,52.5 52.5,31 C31.2 C29.2 65,27.5 ; 65,27.5 79.5,27.5 81.5,29.5 81.5,31.5
  Bottom Layer w3: 135.5,48 S1.1 143.5,56 156.6,56 157.5,55.1 ; 157.5,73 157.5,66.5 157.5,55.1 ; C7.2 C6.2 C5.2 C4.2 160.1,48.75 C3.2 157.5,55.1
VCC-5: C6.1 C7.1 C13.1 C14.1 C23.1 C24.1 C43.1 D1.1 IC.7 IC.20 IC.21 LS.P P1.1 P2.7 P4.1 R2.2 R26.2 R27.2 R28.2 U.1 VR5.3 | length 356.2
  Top Layer w1: IC.20 IC.21 ; P2.7 107.34,35.24 IC.21 ; IC.7 109.88,47.38 107.34,44.84 IC.21
  Bottom Layer w1: C14.1@107.577,29.998 107.58,30.08 P2.7 ; IC.7 109.88,51.38 112.5,54 C23.1 ; R2.2 D1.1 ; C13.1 164,92.41 U.1 168.09,98.59 169.5,100 173.5,100 175,98.5 175,80 178.5,76.5 190.5,76.5 P1.1
  Bottom Layer w2: P4.1 32.5,37.54 C43.1 37.62,29.88 R26.2 R27.2 R28.2 49.88,25 105,25 106.25,26.25 ; C14.1 107.5,27.5 106.25,26.25 ; 112.5,27 C24.1 ; R2.2 140,35 LS.P 135,25 114.5,25 113.25,26.25 106.25,26.25 ; 171.1,28.1 175.1,32.1 VR5.3
  Bottom Layer w3: LS.P 149.5,25.5 162.5,25.5 165.1,28.1 ; C6.1 C7.1 165.1,28.1 ; P1.1 200,67 200,29 197,26 186,26 183.9,28.1 171.1,28.1 165.1,28.1
VCC-9: C4.1 C5.1 C17.1 C28.1 C41.1 S2.9 S4.9 S5.9 VR4.3 VR5.1 | length 196.5
  Top Layer w2: S2.9 44.8,69.3 47,71.5 86,71.5 ; S4.9 87.34,70.16 86,71.5 ; S5.9 129.84,70 130.5,70 ; C4.1 161.6,48.5 154.5,48.5 150,53 150,66.5 146.5,70 130.5,70 ; 86,71.5 129,71.5 130.5,70
  Bottom Layer w1: 87.34,65.16 C28.1 ; S5.9 129.84,66.66 132.5,64 C41.1
  Bottom Layer w2: S2.9 44.8,65.2 C17.1 ; 87.34,65.16 S4.9 ; 171,45 175,49 VR4.3 ; 172,40 172.68,40 VR5.1
  Bottom Layer w3: 171,45 C4.1 C5.1 172,40
VCC-12: C1.1 C2.1 C21.1 C22.1 C33.1 C34.1 C45.1 C46.1 D2.1 D11.1 D18.1 S2.3 S4.3 S5.3 VR1.3 | length 255.4
  Top Layer w1.5: S2.3 52.42,79.92 C22.1 C21.1 52.5,88.7 D2.1 ; S4.3 94.96,79.96 C33.1 C34.1 95,88.7 D11.1 ; S5.3 137.5,75.04 C45.1 C46.1 137.5,88.7 D18.1 ; v1(165,77.5) 187.5,77.5 C1.1
  Bottom Layer w1: S2.3 S2.3@52.5,75.08 ; C45.1@137.46,79.96 C45.1
  Bottom Layer w1.5: 52.42,73.58 S2.3 ; S2.3@52.5,75.08 C22.1 C21.1 52.5,88.7 D2.1 ; D11.1 95,88.7 C34.1 C33.1 95,75.16 S4.3 94.96,73.04 95.5,72.5 136.5,72.5 ; C45.1@137.46,79.96 S5.3 137.46,73.46 136.5,72.5 ; C45.1 C46.1 137.5,88.7 D18.1 ; v1(165,77.5) 157,77.5 152,72.5 136.5,72.5
  Bottom Layer w2: 52.42,73.58 54.5,71.5 93.42,71.5 94.96,73.04 ; C1.1 C2.1 192.5,97.42 VR1.3
VCC-48: J1.1 U.4 VR2.2 VR3.1 | length 116.5
  Top Layer w1: VR2.2 147.5,141.5 150.5,138.5 154.5,138.5 U.4
  Top Layer w3: 163.5,85 170,85 182.5,97.5 182.5,110.5 U.4
  Top Layer w8: U.4 J1.1
  Bottom Layer w8: U.4 J1.1
pads on no net: IC.15 P1.3 P1.4 P2.1 P3.4 S2.4 S2.8 S2.14 S4.4 S4.8 S4.14 S5.4 S5.8 S5.14 VR2.1@152.5,142 VR2.1@182.5,126 VR3.5

## Polygon pours and split planes (outlines as drawn)
NetC42_2 on Bottom Layer "W" (solid, remove dead copper, pour order 30): 131,114.5 129.5,113 129.5,110 128,108.5 122.5,103 132.5,93 145.5,93 148.5,96 148.5,111.5 145.5,114.5
PGND on Bottom Layer "Current Sensor" (solid, pour order 4): 148.5,112 148.5,85.5 155,79 201,79 201,112
PGND on Bottom Layer "PGND" (solid, remove dead copper, pour order 14): 25.5,132 25.5,149 201,149 201,116.5 198.5,114 148,114 146,116 146,131 139,138 31.5,138
NetC27_2 on Bottom Layer "V" (solid, remove dead copper, pour order 28): 88.5,113.5 83.5,108.5 80,108.5 80,101.5 89,92.5 110,92.5 112,94.5 112,110.5 109,113.5
NetC16_2 on Bottom Layer "U" (solid, remove dead copper, pour order 26): 45,112.5 60.04,112.5 62.5,110.04 62.5,97 59.5,94 38.5,94 37,95.5 37,104.5
NetC8_1 on Bottom Layer "power+" (solid, remove dead copper, pour order 12): 40.5,135 36.5,131 36.5,118.5 39.5,115.5 69.5,115.5 70,115 74.5,119.5 84,119.5 85,118.5 85,115 114,115 116,117 122,117 123.5,115.5 143,115.5 144,116.5 144,134.5 143.5,135
S-GND on Bottom Layer "Control Side" (solid, pour order 2): 26.5,72 26.5,24.5 27,25 201.5,25 201.5,72
PGND on Top Layer "PGND" (solid, remove dead copper, pour order 18): 104.5,113.5 108.5,109.5 111,109.5 112.5,108 112.5,97.5 108,93 119,93 119,94 115.5,97.5 115.5,108.5 118.5,111.5 118.5,114.5 105.5,114.5
PGND on Top Layer "PGND" (solid, remove dead copper, pour order 16): 62,113.5 66,109.5 68.5,109.5 70,108 70,97.5 67.5,95 68,94.5 75.5,94.5 75.5,95 73,97.5 73,108.5 78.5,114 78,114.5 63,114.5
PGND on Top Layer "power" (solid, remove dead copper, pour order 10): 200,147.5 200,74 157,74 156.5,73.5 156,74 156,113.5 40,113.5 28.5,125 28.5,133 43,147.5
NetC16_2 on Top Layer "PGND" (solid, remove dead copper, pour order 24): 45.04,110 39.5,110 37.5,108 37.5,100 61.5,100 63,101.5 63,109.54 60.04,112.5 60,112.46 60,110 53.5,110 51,112.5 45.04,112.5
NetC27_2 on Top Layer "PGND" (solid, remove dead copper, pour order 22): 87.5,110.5 81,110.5 79.5,109 79.5,101.5 83,101.5 85.04,99.46 85.58,100 103.5,100 105,101.5 105,110 102.5,112.5 102,112 102,111 101,110 95.5,110 93.5,112 87.5,112
NetC42_2 on Top Layer "PGND" (solid, remove dead copper, pour order 20): 129,112.5 129,109.5 124,109.5 122,107.5 122,101 123.5,99.5 145,99.5 147.5,102 147.5,109.5 139,109.5 135.5,113 129.5,113
S-GND on Top Layer "Control-top" (solid, remove dead copper, pour order 6): 26,71.5 26,24.5 199.5,24.5 200,24 200,71.5

## Keep-outs
Keep-Out Layer:
  lines w1: 24.5,145 24.5,150 202.5,150 202.5,22.5 24.5,22.5 24.5,144.5 24.5,145.5

## Text inside footprints (layer, text, board x,y; h text height)
C2: Top Overlay "+" at 193,93 h1.52 r180
C3: Top Overlay "+" at 165.6,55.5 h1.52 r180
LS: Top Overlay "-" at 132.731,32.435 h1.27 r180; Top Overlay "+" at 146.711,32.435 h1.27 r180
S3: Top Overlay "TB6551F" at 66.1,45.8 h1 r180; Top Overlay "1" at 69.506,50.632 h0.8 r180; Top Overlay "24" at 70.5,41.1 h0.8 r180; Top Overlay "12" at 56.706,50.632 h0.8 r180; Top Overlay "13" at 56.806,41.132 h0.8 r180
VR2: Top Overlay "In-" at 147,127 h1; Top Overlay "Out-" at 184,127 h1; Top Overlay "In+" at 147,140.5 h1; Top Overlay "Out+" at 184,140.5 h1